# Altium PCB PCB.PcbDoc
Units mm, origin at the board's own origin, x right, y up, seen from the top; angles counter-clockwise.
Board outline 90 x 52 mm, 2 copper layers (Top Layer, Bottom Layer); 28 components, 33 nets, 105 pads, 0 vias.
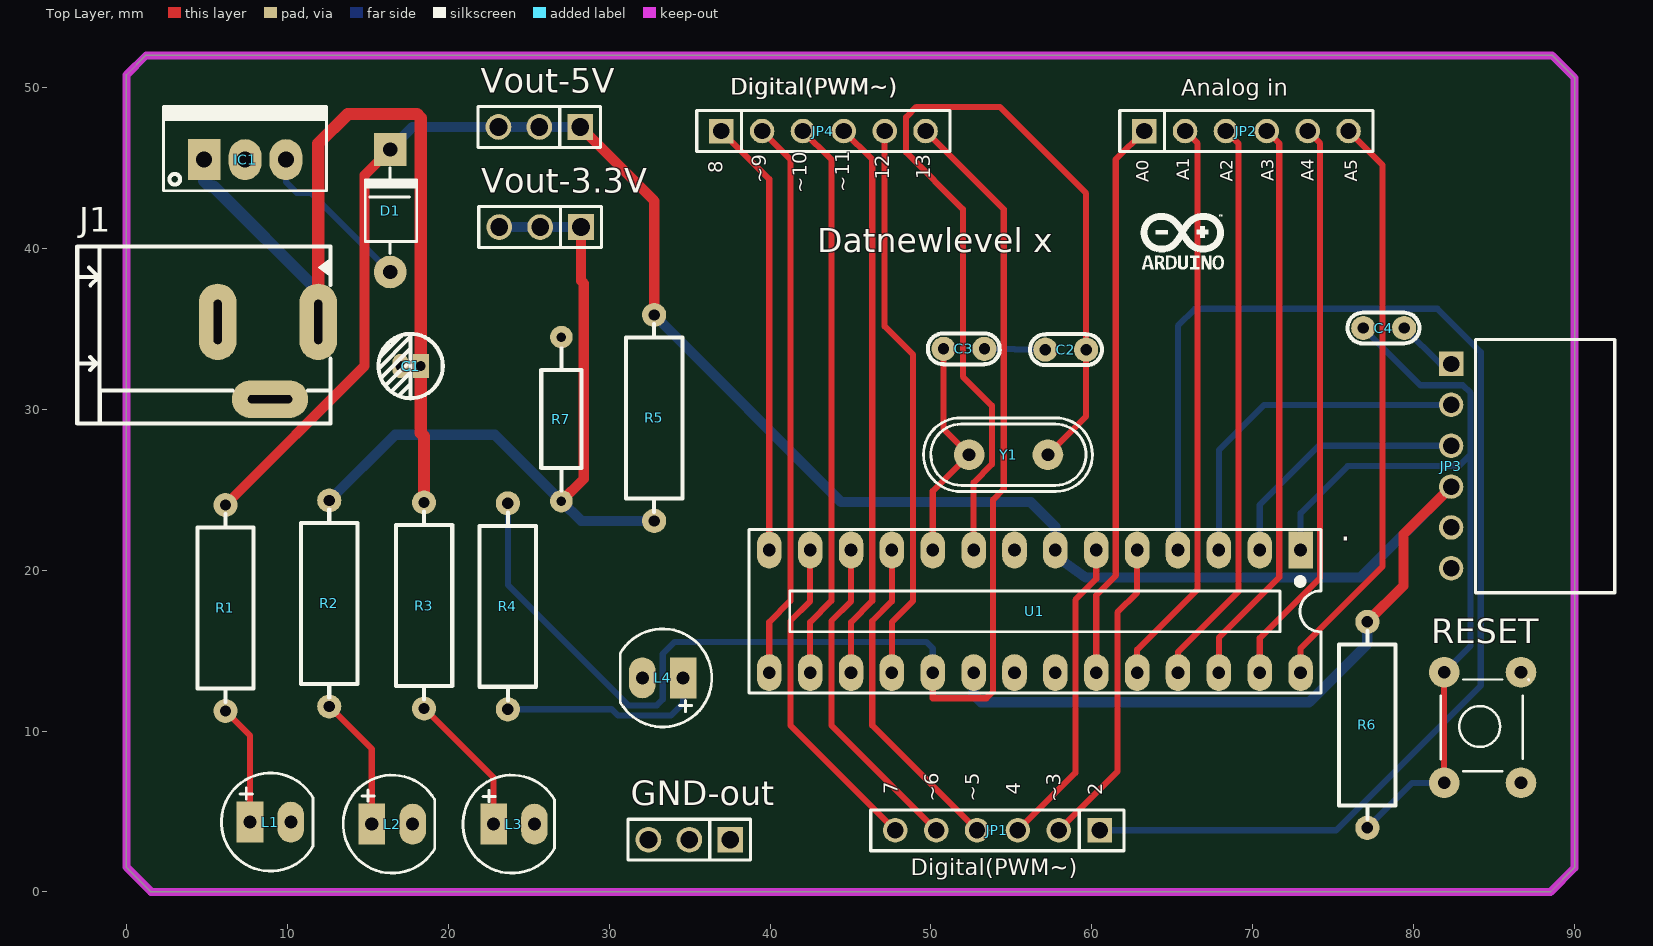
[diagram p0: Top Layer view]
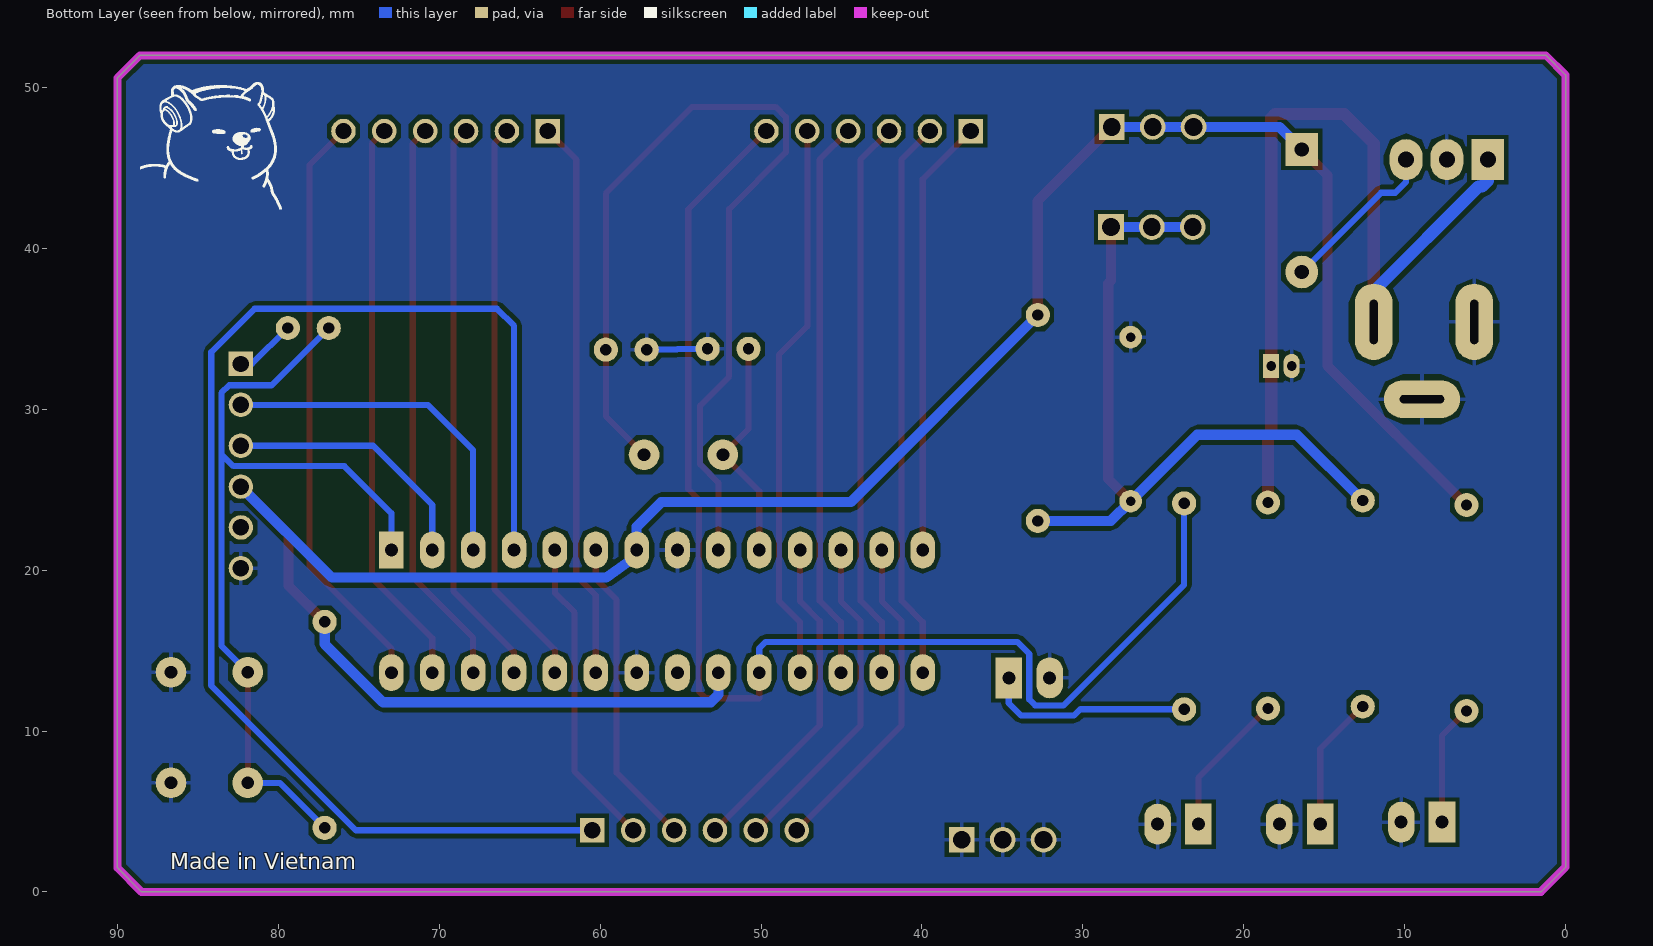
[diagram p1: Bottom Layer view, seen from below]
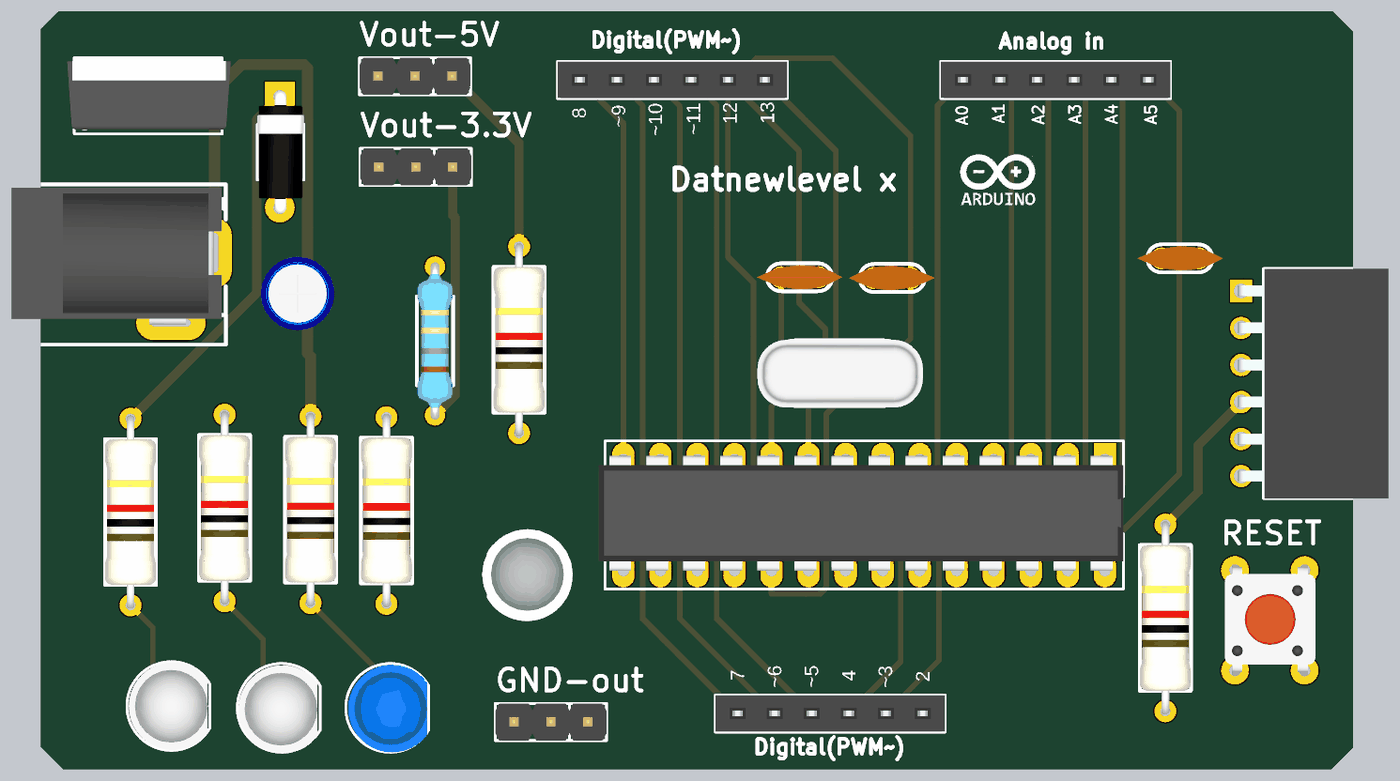
[diagram p2: 3D render of the assembled board from above, using the file's embedded part models]

## Layer stack, top to bottom
Top Solder: solder mask 0.0102, Solder Resist, Dk 3.5
Top Layer: signal copper 0.0356
Dielectric 1: dielectric 0.32, FR-4, Dk 4.8
Bottom Layer: signal copper 0.0356
Bottom Solder: solder mask 0.0102, Solder Resist, Dk 3.5

## Board outline
0,1.525 1.525,0 88.5,0 90,1.5 90,50.6 88.6,52 1.225,52 0,50.775

## Design rules (kind name [scope] priority, off if disabled: settings)
Clearance [All] p1: gap=0.254 ignorepadtopadclearanceinfootprint=FALSE
PolygonConnect [All] p1: connectstyle=Relief reliefconductorwidth=0.254 reliefentries=4 polygonreliefangle="90 Angle" airgapwidth=0.254
RoutingVias [All] p1: holewidth=0.635 width=0.635 viastyle="Through Hole" minholewidth=0.635 minwidth=0.635 maxholewidth=0.635 maxwidth=0.635
SolderMaskExpansion [All] p1: expansion=0.102 istentingtop=FALSE
Width "Schematic Width Constraint_2" [InNet('3.3V')] p1: maxlimit=0.635 minlimit=0.635 preferedwidth=0.635
Width "Schematic Width Constraint_1" [InNet('9V')] p2: maxlimit=0.762 minlimit=0.762 preferedwidth=0.762
Width "Schematic Width Constraint" [InNet('5V')] p3: maxlimit=0.635 minlimit=0.635 preferedwidth=0.635
Width [All] p4: maxlimit=0.381 minlimit=0.381 preferedwidth=0.381
30 further rules are at their usual default settings.

## Components (designator, comment, footprint, x,y, rotation, side; value= is the part's Value field where it differs from the comment)
C1 "10uF" "tu hoa 4mm" 17.663,32.685 r180 top
C2 "22pF" "tu gom" 58.379,33.701 r180 top
C3 "22pF" "tu gom" 52.055,33.752 r0 top
C4 "101" "tu gom" 78.14,35.047 r0 top
D1 "100v" "DIODE 1A" 16.393,37.257 r270 top
GND-out "JP 1x3 2.54" "JP 1x3 DT" 37.526,3.246 r180 top
IC1 "LM7805" QTO-220 4.836,45.512 r0 top
J1 "DC -JACK" CON3_129_PJ-002A_TH_RA 11.923,35.425 r0 top
JP1 "Digital pin" "JP 1x6 CT" 60.487,3.831 r180 top
JP2 "Analog pin" "JP 1x6 CT" 63.256,47.29 r0 top
JP3 "JP 1x6 2.54" "JP 1x6 CC" 82.329,26.462 r270 top
JP4 "Digital Pin" "JP 1x6 CT" 36.967,47.29 r0 top
L1 "LED 5mm" LED-5MM-RED 7.681,4.339 r0 top
L2 "LED 5mm" LED-5MM-Yellow 15.25,4.212 r0 top
L3 "LED 5mm" LED-5MM-BLUE 23.962,4.212 r0 top
L4 "LED 5mm" LED-5MM-WHITE 33.335,13.305 r180 top
R1 "220R" "tro vach 1/2w" 6.157,17.648 r90 top
R2 "220R" "tro vach 1/2w" 12.608,17.928 r90 top
R3 "330R" "tro vach 1/2w" 18.501,17.801 r90 top
R4 "220R" "tro vach 1/2w" 23.708,17.75 r90 top
R5 "1k" "tro vach 1/2w" 32.801,29.459 r90 top
R6 "10k" "tro vach 1/2w" 77.124,10.384 r90 top
R7 "2k" "tro vach 1/4w" 27.036,29.383 r270 top
RESET "Nut Nhan 4 Chan Cam 6x6" "Nut Nhan 4 Chan Cam 6x6" 81.696,7.107 r90 top (schematic designator BT1)
U1 "Atmega328P" DIP28/W0.3 72.975,21.25 r180 top value=DIP28
Vout-3.3V "JP 1x3 2.54" "JP 1x3 DT" 28.255,41.321 r180 top
Vout-5V "JP 1x3 2.54" "JP 1x3 DT" 28.204,47.544 r180 top
Y1 "16Mhz" "Thach Anh 2 chan cam" 54.823,27.173 r0 top value=4Mhz

## Footprints (in the part's own frame and the unit in brackets; to place one, negate y for a bottom-side part, rotate by r counter-clockwise, add the part's x,y. Pads: shape width x height; smd on the part's side, far side on the other; paste and mask are expansions set on the pad)
CON3_129_PJ-002A_TH_RA [mm] "DC JACK"
  oval 2.35x4.75 hole 0.5 slot 2.75 at 90 deg: 1(0,0) 2(-6.248,0)
  oval 4.75x2.35 hole 2.75 slot 0.5 at 90 deg: 3(-2.997,-4.801)
  silkscreen extent -14.98,-6.3 0.81,4.7, body extent -13.92,-4.93 0.48,4.47, height 11.01
"DIODE 1A" [mil] "Diode 1A"
  round 80 hole 35: 1(-50,0)
  rect 80x80 hole 35: 2(-350,0)
  silkscreen extent -305,-61 -95,65, body extent -366,-61 -34,65, height 122
DIP28/W0.3 [mil] "28 PIN, W 300mil, Pin to pin 100mil"
  rect 60x90 hole 31: 1(0,0)
  oval 60x90 hole 31: 2(100,0) 3(200,0) 4(300,0) 5(400,0) 6(500,0) 7(600,0) 8(700,0) 9(800,0) 10(900,0) 11(1000,0) 12(1100,0) 13(1200,0) 14(1300,0) 15(1300,300) 16(1200,300) 17(1100,300) 18(1000,300) 19(900,300) 20(800,300) 21(700,300) 22(600,300) 23(500,300) 24(400,300) 25(300,300) 26(200,300) 27(100,300) 28(0,300)
  silkscreen extent -50,-50 1350,350, body extent -50,-10 1367,300, height 200
"JP 1x3 DT" [mm]
  rect 1.6x1.6 hole 1.1: 1(0,0)
  round 1.6 hole 1.1: 2(2.54,0) 3(5.08,0)
  silkscreen extent -1.27,-1.27 6.35,1.27, body extent -1.27,-1.27 6.35,1.27, height 8.54
"JP 1x6 CC" [mm] "06p 1 row Right angle"
  rect 1.52x1.52 hole 1.02: 1(-6.35,0)
  round 1.52 hole 1.02: 2(-3.81,0) 3(-1.27,0) 4(1.27,0) 5(3.81,0) 6(6.35,0)
  silkscreen extent -7.87,1.52 7.87,10.17, body extent -7.87,-0.21 7.87,10.09, height 2.51
"JP 1x6 CT" [mm] "6 row, straight, gold plating"
  rect 1.52x1.52 hole 1.02: 1(0,0)
  round 1.52 hole 1.02: 2(2.54,0) 3(5.08,0) 4(7.62,0) 5(10.16,0) 6(12.7,0)
  silkscreen extent -1.52,-1.27 14.22,1.27, body extent -1.52,-1.25 14.22,1.25, height 8.51
LED-5MM-BLUE [mil] "LED 2 PIN, 5 ly , Only colour, pin to pin 110mil"
  rect 65x100 hole 32: 1(-45,0)
  oval 65x100 hole 32: 2(55,0)
  silkscreen extent -120,-120 104,120, body extent -113,-120 100,117, height 339
LED-5MM-RED [mil] "LED 2 PIN, 5 ly , Only colour,pin to pin 100mil"
  rect 65x100 hole 32: 1(0,0)
  oval 65x100 hole 32: 2(100,0)
  silkscreen extent -70,-120 154,120, body extent -65,-119 149,118, height 339
LED-5MM-WHITE [mil] "LED 2 PIN, 5 ly , Only colour, pin to pin 110mil"
  rect 65x100 hole 32: 1(-50,0)
  oval 65x100 hole 32: 2(50,0)
  silkscreen extent -120,-120 104,120, body extent -124,-125 121,120, height 340
LED-5MM-Yellow [mil] "LED 2 PIN, 5 ly , Only colour,pin to pin 100mil"
  rect 65x100 hole 32: 1(0,0)
  oval 65x100 hole 32: 2(100,0)
  silkscreen extent -70,-120 154,120, body extent -67,-122 147,115, height 339
"Nut Nhan 4 Chan Cam 6x6" [mil] "SW button 4pin, 250 x250 mil"
  round 75 hole 31: 1(-13,-8) 1(258,-8) 2(-13,-196) 2(258,-196)
  silkscreen extent 15,-215 240,0, body extent -31,-225 281,19, height 276
QTO-220 [mil] "TO-220 - 1-2-3"
  rect 80x100 hole 39: 1(0,0)
  oval 80x100 hole 39: 2(100,0) 3(200,0)
  silkscreen extent -100,-76 300,130, body extent -119,-64 322,121, height 755
"Thach Anh 2 chan cam" [mm]
  round 1.905 hole 0.8: 1(-2.45,0) 2(2.45,0)
  silkscreen extent -5.28,-2.29 5.21,2.29, body extent -5.68,-2.36 5.68,2.29, height 3.5
"tro vach 1/2w" [mm]
  round 1.5 hole 0.7: 1(-6.4,0) 2(6.4,0)
  silkscreen extent -5.84,-1.75 5.84,1.75, body extent -6.62,-1.75 6.62,1.75, height 3.5
"tro vach 1/4w" [mm]
  round 1.4 hole 0.6: 1(-5.1,0) 2(5.1,0)
  silkscreen extent -4.39,-1.25 4.42,1.25, body extent -5.38,-1.2 5.38,1.2, height 2.41
"tu gom" [mm] "Tu gom mini"
  round 1.5 hole 0.7: 1(-1.27,0) 2(1.27,0)
  silkscreen extent -2.25,-0.97 2.22,0.97, body extent -2.92,-0.85 2.92,0.85, height 6.12
"tu hoa 4mm" [mm]
  rect 1x1.5 hole 0.6: 1(-0.635,0)
  oval 1x1.5 hole 0.6: 2(0.635,0)
  silkscreen extent -2,-2 2.01,2.01, body extent -2.47,-2.47 2.58,2.58, height 14.81

## Part data
C1: library part "Tu Hoa 10uF 25V 4x7", "Cắm", Chung_Loai=Cắm, Don_Vi=Con, Ma_Hang=MH001349, So_Chan=2, Ten_Linh_Kien="Tụ Hóa 10uF 25V 4x7MM"
C2 C3: library part "Tu gom 22pF 50V", "Cắm", Chung_Loai=Cắm, Don_Vi=Con, Ma_Hang=MH004771, So_Chan=2, Ten_Linh_Kien="Tụ gốm 22P 50V"
C4: library part "Tu gom 101 50V", "Cắm", Chung_Loai=Cắm, Don_Vi=Con, Ma_Hang=MH004764, So_Chan=2, Ten_Linh_Kien="Tụ gốm 101 0.1nF 50V"
D1: library part "Diode 1N4007", "Cắm", Chung_Loai=Cắm, Don_Vi=Con, Ma_Hang=MH001063, Ten_Linh_Kien="Diode 1N4007 1A (DIP)"
GND-out Vout-3.3V Vout-5V: library part "JP 1x3 2.54 Duc Thang", "Cắm", Chung_Loai=Cắm, Don_Vi=Con, Ma_Hang=MH000903, Ten_Linh_Kien="Jump Đơn Đực 2.54MM 1x40P Thẳng 11MM"
IC1: library part LM78xx, "On ap +, from + 5 to + 24VDC"
J1: library part CON-PLG_3X1-228-DC_JACK, "3 Pins, 1 Row 228mil Pitch, right angle Connector, male", Alternate Part Number-1=NA, Case/Package=TH-CON, Manufacturer=JST, Manufacturer Part Number=PJ-002A, Supplier Part Number-1=NA, Supplier-1="SP ROAD"
JP1 JP2 JP4: library part "JP 1x6 2.54 Cai Thang", "Cắm", Chung_Loai=Cắm, Don_Vi=Con, Ma_Hang=MH004006, Ten_Linh_Kien="Jump Đơn Cái 2.54MM 1x20P Thẳng"
JP3: library part "JP 1x6 2.54 Cai Cong", "Cắm", Chung_Loai=Cắm, Don_Vi=Con, Ma_Hang=MH001265, Ten_Linh_Kien="Jump Đơn Cái 2.54MM 1x40P Cong"
L1: library part "LED 5mm Do", "Cắm", Chung_Loai=Cắm, Don_Vi=Con, Ma_Hang=MH008967, Ten_Linh_Kien="Led 5MM Phủ Đỏ (1000c)"
L2: library part "LED 5mm Vang", "Cắm", Chung_Loai=Cắm, Don_Vi=Con, Ma_Hang=MH008968, Ten_Linh_Kien="Led 5MM Phủ Vàng (1000c)"
L3: library part "LED 5mm Xanh Duong", "Cắm", Chung_Loai=Cắm, Don_Vi=Con, Ma_Hang=MH008987, Ten_Linh_Kien="Led 5MM Xanh Dương Đục (1000c)"
L4: library part "LED 5mm Trang", "Cắm", Chung_Loai=Cắm, Don_Vi=Con, Ma_Hang=MH008983, Ten_Linh_Kien="Led 5MM Trắng Đục (1000c)"
R1 R2 R4: library part "Tro Vach 1/2W 5% 240R", "Cắm", Chung_Loai=Cắm, Don_Vi=Con, Ma_Hang=MH006191, So_Chan=2, Ten_Linh_Kien="Trở 5% 1/2w 240R"
R3: library part "Tro Vach 1/2W 5% 330R", "Cắm", Chung_Loai=Cắm, Don_Vi=Con, Ma_Hang=MH006204, So_Chan=2, Ten_Linh_Kien="Trở 5% 1/2w 330R"
R5: library part "Tro Vach 1/2W 5% 1k", "Cắm", Chung_Loai=Cắm, Don_Vi=Con, Ma_Hang=MH007240, So_Chan=2, Ten_Linh_Kien="Trở 5% 1/2w 1K"
R6: library part "Tro Vach 1/2W 5% 10k", "Cắm", Chung_Loai=Cắm, Don_Vi=Con, Ma_Hang=MH006206, So_Chan=2, Ten_Linh_Kien="Trở 5% 1/2w 10k"
R7: library part "Tro Vach 1/4W 5% 2k", "Cắm", Chung_Loai=Cắm, Don_Vi=Con, Ma_Hang=MH007305, So_Chan=2, Ten_Linh_Kien="Trở Vạch 1/4w 5% 2k"
RESET: "Nut Nhan 4 Chan 6x6mm", Ma_Hang=MH004584, Ten="Nút Nhấn 4 Chân 6x6x5MM DIP"
U1: library part DIP28, "DIP28"
Y1: library part "Thach Anh 2 chan Cam", "Crystal For all Crystal 2pin."

## Nets (pads, with @x,y where several pads share a name; then routed paths per layer and width w, separated by ;. In a path a pad name is that pad's centre, name@x,y a point inside that pad or via, vN(x,y) a via of type N, cw(c..) or ccw(c..) an arc to the next point about the centre after c; other vN are vias at no path point)
3.3V: R2.2 R5.1 R7.2 Vout-3.3V.1 Vout-3.3V.2 Vout-3.3V.3 | length 46.9
  Top Layer w0.635: R7.2 28.42,25.667 28.42,37.818 28.255,37.983 Vout-3.3V.1
  Bottom Layer w0.635: R2.2 16.701,28.42 22.899,28.42 R7.2 28.259,23.059 R5.1 ; Vout-3.3V.3 Vout-3.3V.2 Vout-3.3V.1
5V: D1.2 JP3.4 R1.2 R5.2 R6.2 U1.7 U1.20 Vout-5V.1 Vout-5V.2 Vout-5V.3 | length 151.4
  Top Layer w0.635: R1.2 14.805,32.697 14.805,44.559 D1.2 ; Vout-5V.1 32.801,42.947 R5.2 ; R6.2 79.372,19.031 79.372,22.235 JP3.4
  Bottom Layer w0.635: D1.2 17.79,47.544 Vout-5V.3 Vout-5V.2 Vout-5V.1 ; R5.2 44.432,24.229 56.207,24.229 57.735,22.701 U1.7 57.735,20.876 59.631,19.536 76.672,19.536 JP3.4 ; U1.20 52.655,12.262 53.134,11.783 73.505,11.783 77.124,15.403 R6.2
9V: C1.1 IC1.1 J1.1 R3.2 | length 55.5
  Top Layer w0.762: J1.1 11.923,46.507 13.764,48.347 18.056,48.347 18.298,48.106 C1.1 18.298,28.522 18.501,28.318 R3.2
  Bottom Layer w0.762: IC1.1 4.836,44.193 5.191,43.838 5.421,43.838 11.923,37.335 J1.1
A0: JP2.1 U1.23 | length 34.9
  Top Layer w0.381: U1.23 60.275,18.442 61.49,19.657 61.49,45.524 JP2.1
A1: JP2.2 U1.24 | length 35.5
  Top Layer w0.381: U1.24 62.815,15.06 66.57,18.815 66.57,46.516 JP2.2
A2: JP2.3 U1.25 | length 35.5
  Top Layer w0.381: U1.25 65.355,14.907 69.11,18.663 69.11,46.516 JP2.3
A3: JP2.4 U1.26 | length 35.5
  Top Layer w0.381: U1.26 67.895,15.8 71.65,19.555 71.65,46.516 JP2.4
A4: JP2.5 U1.27 | length 35.5
  Top Layer w0.381: U1.27 70.435,15.771 74.19,19.526 74.19,46.516 JP2.5
A5: JP2.6 U1.28 | length 36.7
  Top Layer w0.381: U1.28 72.975,15.136 78.077,20.237 78.077,45.169 JP2.6
D2: JP1.1 U1.4 | length 82.4
  Bottom Layer w0.381: JP1.1 75.179,3.831 84.173,12.824 84.173,33.551 81.48,36.243 66.418,36.243 65.355,35.18 U1.4
D4: JP1.3 U1.6 | length 19.4
  Top Layer w0.381: JP1.3 58.976,7.399 58.976,18.155 60.275,19.454 U1.6
D7: JP1.6 U1.13 | length 20.6
  Top Layer w0.381: U1.13 42.495,18.061 41.272,16.838 41.272,10.346 JP1.6
D8: JP4.1 U1.14 | length 27.3
  Top Layer w0.381: JP4.1 39.955,44.302 U1.14
D12: JP4.5 U1.18 | length 34.9
  Top Layer w0.381: JP4.5 47.127,35.151 48.892,33.386 48.892,18.082 47.575,16.765 U1.18
D13: JP4.6 R4.2 U1.19 | length 82.2
  Top Layer w0.381: JP4.6 54.531,42.426 54.531,25.042 53.87,24.381 53.87,12.456 53.451,12.037 50.115,12.037 U1.19
  Bottom Layer w0.381: R4.2 23.708,19.085 31.203,11.59 32.964,11.59 33.335,11.961 33.335,14.793 34.084,15.542 49.709,15.542 50.115,15.136 U1.19
GND: C1.2 C2.2 C3.2 GND-out.1 GND-out.2 GND-out.3 IC1.2 J1.2 J1.3 JP3.6 L1.2 L2.2 L3.2 L4.2 R7.1 RESET.2 U1.8 U1.22 | length 5.4
  Top Layer w0.381: J1.2@5.675,33.876 J1.2
  Bottom Layer w0.381: L1.2@10.221,4.315 L1.2 ; C1.2 C1.2@17.028,32.687 ; C3.2 55.191,33.752 55.242,33.701 C2.2
NetC4_2: C4.2 JP3.1 | length 3.8
  Bottom Layer w0.381: C4.2 81.646,32.812 JP3.1
NetD1_1: D1.1 IC1.3 | length 10.2
  Bottom Layer w0.381: IC1.3 9.916,44.13 10.589,43.457 11.463,43.457 D1.1
NetL1_1: L1.1 R1.1 | length 7.5
  Top Layer w0.381: R1.1 7.681,9.724 L1.1
NetL2_1: L2.1 R2.1 | length 8.4
  Top Layer w0.381: R2.1 15.25,8.886 L2.1
NetL3_1: L3.1 R3.1 | length 9
  Top Layer w0.381: R3.1 22.819,7.083 L3.1
NetL4_1: L4.1 R4.1 | length 13
  Bottom Layer w0.381: R4.1 30.16,11.35 30.554,10.955 33.828,10.955 34.605,11.732 L4.1
RESET: C4.1 R6.1 RESET.1 U1.1 | length 53.6
  Top Layer w0.381: RESET.1@81.9,6.777 RESET.1@81.9,13.66
  Bottom Layer w0.381: U1.1 72.975,23.547 75.892,26.464 82.801,26.464 83.538,27.201 ; C4.1 80.424,31.493 83.055,31.493 83.538,31.011 83.538,27.201 ; R6.1 79.918,6.777 RESET.1@81.9,6.777 ; RESET.1@81.9,13.66 83.538,15.298 83.538,27.201
RX: JP3.3 U1.2 | length 16.2
  Bottom Layer w0.381: U1.2 70.435,24.051 74.116,27.732 JP3.3
TX: JP3.2 U1.3 | length 21.8
  Bottom Layer w0.381: U1.3 67.895,27.459 70.708,30.272 JP3.2
XTAL1: C2.1 U1.9 Y1.2 | length 60.5
  Top Layer w0.381: U1.9 52.655,25.427 53.794,26.566 53.794,30.223 51.991,32.027 51.991,42.441 48.46,45.971 48.46,48.156 49.095,48.791 54.277,48.791 59.649,43.418 C2.1 59.649,29.549 Y1.2
XTAL2: C3.1 U1.10 Y1.1 | length 14.1
  Top Layer w0.381: U1.10 50.115,24.915 Y1.1 50.785,28.762 C3.1
~D3: JP1.2 U1.5 | length 19.4
  Top Layer w0.381: JP1.2 61.592,7.475 61.592,17.371 62.815,18.594 U1.5
~D5: JP1.4 U1.11 | length 20.6
  Top Layer w0.381: U1.11 47.575,18.061 46.352,16.838 46.352,10.346 JP1.4
~D6: JP1.5 U1.12 | length 20.6
  Top Layer w0.381: U1.12 45.035,18.061 43.812,16.838 43.812,10.346 JP1.5
~D9: JP4.2 U1.15 | length 34.9
  Top Layer w0.381: JP4.2 41.272,45.525 41.272,18.082 39.955,16.765 U1.15
~D10: JP4.3 U1.16 | length 34.9
  Top Layer w0.381: JP4.3 43.812,45.525 43.812,18.082 42.495,16.765 U1.16
~D11: JP4.4 U1.17 | length 34.9
  Top Layer w0.381: JP4.4 46.352,45.525 46.352,18.082 45.035,16.765 U1.17
pads on no net: JP3.5 U1.21

## Polygon pours and split planes (outlines as drawn)
GND on Bottom Layer "GND_Botton" (solid, remove dead copper, pour order 0): -2.522,56.205 95.22,56.205 99.45,51.975 96.825,49.35 96.825,-4.35 -6.125,-4.35 -7.25,-5.475
no net on Bottom Overlay "GND_Botton" (solid): 0,50.775 1.225,52

## Keep-outs
Keep-Out Layer:
  lines w0.5: 1.525,0 88.497,0 89.997,1.5 89.997,50.599 88.599,51.997 1.234,51.997 0.011,50.774 0.011,1.539 1.525,0.025

## Silkscreen, mask and mechanical layers (free items; w line width, h text height)
Top Overlay:
  drawing of 12 lines, arcs and shapes, not listed
  text "Digital(PWM~)" at 37.543,49.546 h1.02
  text "Digital(PWM~)" at 37.554,49.543 h1.02
  text "Analog in" at 65.554,49.468 h1.02
  text "8" at 37.383,44.65 h1.52 r90
  text "13" at 50.283,44.3 h1.52 r90
  text "12" at 47.725,44.275 h1.52 r90
  text "A1" at 66.048,44.227 h0.76 r90
  text "A3" at 71.298,44.177 h0.76 r90
  text "A4" at 73.798,44.177 h0.76 r90
  text "A2" at 68.773,44.152 h0.76 r90
  text "A5" at 76.498,44.152 h0.76 r90
  text "A0" at 63.548,44.102 h0.76 r90
  text "~9" at 40.083,44.05 h1.52 r90
  text "~11" at 45.225,43.5 h1.52 r90
  text "~10" at 42.608,43.425 h1.52 r90
  text "Datnewlevel x" at 42.925,39.75 h1.5
  text "." at 75.437,21.837 h1.52
  text "7" at 48.25,6.075 h1.52 r90
  text "4" at 55.875,6.05 h1.52 r90
  text "2" at 60.95,5.999 h1.52 r90
  text "~6" at 50.783,5.6 h1.52 r90
  text "~5" at 53.308,5.6 h1.52 r90
  text "~3" at 58.384,5.578 h1.52 r90
  text "Digital(PWM~)" at 48.741,1.051 h1.02
Bottom Overlay:
  drawing of 4 lines, arcs and shapes, not listed
  text "Made in Vietnam" at 86.725,1.425 h1